# Altium PCB AVR-programming-cable.PcbDoc
Units mil, origin at the board's own origin, x right, y up, seen from the top; angles counter-clockwise.
Board outline 710.01 x 520 mil, 2 copper layers (Top, Bottom), stack 61.902 mil thick; 9 components, 11 nets, 31 pads, 7 vias.
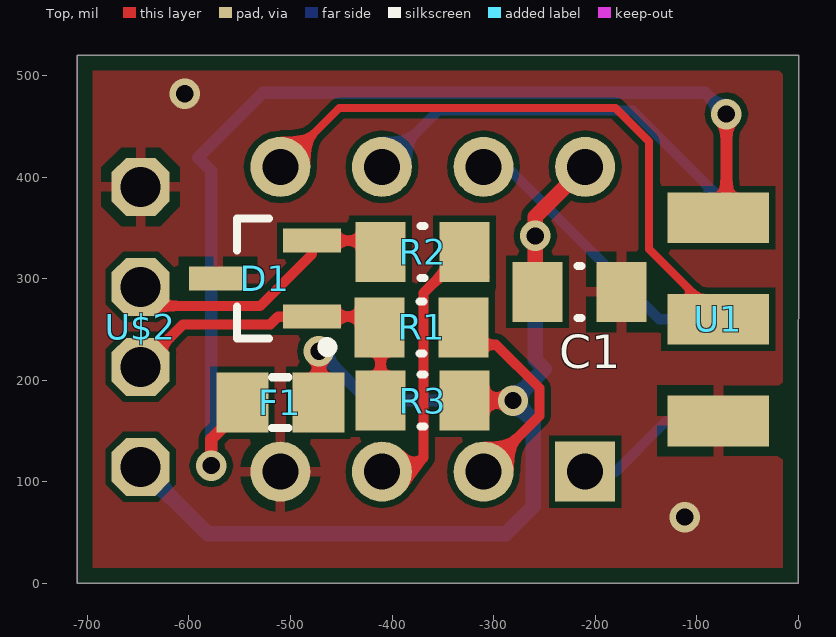
[diagram p0: Top view]
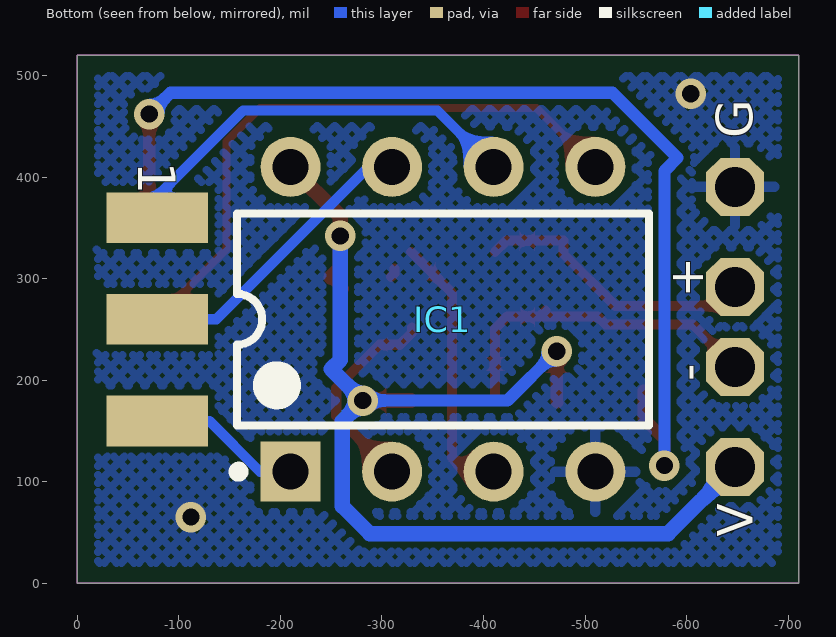
[diagram p1: Bottom view, seen from below]

## Layer stack, top to bottom
Top Solder: solder mask 0.4, Solder Resist, Dk 3.5
Top: signal copper 1.4016
Dielectric 1: core 59.0984, FR-4, Dk 4.8
Bottom: signal copper 1.4016
Bottom Solder: solder mask 0.4, Solder Resist, Dk 3.5

## Board outline
0.01,520 -0.01,0 -710,0 -710,520

## Design rules (kind name [scope] priority, off if disabled: settings)
BoardOutlineClearance [All] p1: gap=15 ignorepadtopadclearanceinfootprint=FALSE
Clearance [All] p1: gap=6 ignorepadtopadclearanceinfootprint=FALSE
Clearance "Clearance (Same Net)" [All] p2: gap=0 ignorepadtopadclearanceinfootprint=FALSE except(6: SMDPad-SMDPad SMDPad-THPad SMDPad-Via)
ComponentClearance [All] p1 off: gap=10 collisioncheckmode=3 verticalgap=10 showdistances=FALSE
Height [All] p1 off: minheight=0 maxheight=1000 prefheight=500
HoleSize HoleSize_1 [All] p1: absolutevalues=TRUE maxlimit=100000 minlimit=13 maxpercent=80.000 minpercent=20.000
HoleSize [All] p2: absolutevalues=TRUE maxlimit=100 minlimit=1 maxpercent=80.000 minpercent=20.000
HoleToHoleClearance mdViaViaSameLayer [All] p1: gap=8 allowstackedmicrovias=TRUE
HoleToHoleClearance [All] p2: gap=10 allowstackedmicrovias=TRUE
MinimumAnnularRing [All] p1: minimumring=5
MinimumSolderMaskSliver [All] p1: minsoldermaskwidth=3
PasteMaskExpansion mlMinCreamFrame [All] p1: expansion=0
PasteMaskExpansion [All] p2: expansion=0
PlaneClearance [All] p1: clearance=10
PolygonConnect ThermalVias [IsVia] p1: connectstyle=Direct reliefconductorwidth=10 reliefentries=4 polygonreliefangle="90 Angle" airgapwidth=10
PolygonConnect [All] p2: thpad.connectstyle=Relief thpad.reliefconductorwidth=10 thpad.reliefentries=4 thpad.polygonreliefangle="90 Angle" thpad.airgapwidth=10 smdpad.connectstyle=Relief smdpad.reliefconductorwidth=10 smdpad.reliefentries=4 smdpad.polygonreliefangle="90 Angle" smdpad.airgapwidth=10 via.connectstyle=Direct via.reliefconductorwidth=10 via.reliefentries=4 via.polygonreliefangle="90 Angle" via.airgapwidth=10
RoutingVias [All] p1: holewidth=17 width=27 viastyle="Through Hole" minholewidth=15 minwidth=28 maxholewidth=32 maxwidth=50
SilkToSilkClearance [All] p1 off: silktosilkclearance=10
SilkToSolderMaskClearance [IsPad] p1 off: minsilkscreentomaskgap=10 clearancetoexposedcopper=TRUE
SolderMaskExpansion mlMinStopFrame [All] p1: expansion=4
SolderMaskExpansion [All] p2: expansion=4
Width Width_1 [All] p1: maxlimit=100000 minlimit=6 preferedwidth=10
Width [All] p2: maxlimit=100 minlimit=6 preferedwidth=10
21 further rules are at their usual default settings.

## Components (designator, comment, footprint, x,y, rotation, side; value= is the part's Value field where it differs from the comment)
C1 "100n" RESC0805(2012)_M -215.5,287 r0 top
D1 "3.6V" SOT23_M -525,300 r180 top
F1 "150mA" SMD-0805 -510,178 r0 top
IC1 "ATTINY85" 8P3 -360,260 r90 bottom
R1 "68" RESC0805(2012)_M -371,252 r0 top
R2 "68" RESC0805(2012)_M -370,326.35 r0 top
R3 "1k5" RESC0805(2012)_M -370,180 r0 top
U1 "6_PIN_ISPEDGE-INVERTED" 6_PIN_EDGE -79,260 r90 top
U$2 "USB2.5-2.0-2.5" USB-FEMALE-A -647.48,252.6 r270 top

## Footprints (in the part's own frame and the unit in brackets; to place one, negate y for a bottom-side part, rotate by r counter-clockwise, add the part's x,y. Pads: shape width x height; smd on the part's side, far side on the other; paste and mask are expansions set on the pad)
6_PIN_EDGE [mil] "6_PIN_EDGE"
  rect 50x100 smd: 1(100,0) 3(0,0) 5(-100,0)
  rect 50x100 smd far side: 2(100,0) 4(0,0) 6(-100,0)
8P3 [mm] "DIP, 8-Pin, Row Spacing 7.62 mm, Pitch 2.54 mm"
  rect 1.5x1.5 hole 0.9: 1(-3.81,3.81)
  round 1.5 hole 0.9: 2(-3.81,1.27) 3(-3.81,-1.27) 4(-3.81,-3.81) 5(3.81,-3.81) 6(3.81,-1.27) 7(3.81,1.27) 8(3.81,3.81)
  silkscreen extent -3.93,-5.15 2.65,5.24, body extent -3.6,-5.15 3.6,5.15, height 5.34
RESC0805(2012)_M [mm] "Chip Resistor, Body 2.0x1.3mm, IPC Low Density"
  rect 1.25x1.5 smd: 1(-1.05,0) 2(1.05,0)
  silkscreen extent -0.05,-0.65 0.05,0.65, body extent -1.1,-0.67 1.1,0.67, height 0.7
SMD-0805 [mil] "SMD-0805"
  rect 51.18x59.06 smd: 1(-37.4,0) 2(37.4,0)
  silkscreen extent -8,-25 8,25
SOT23_M [mm] "SOT23, 3-Leads, Body 2.9x1.3mm, Pitch 0.95mm, Lead Span 2.3mm - Reverse Pinning, IPC Low Density"
  rect 1.45x0.6 smd: 1(-1.175,0.95) 2(-1.175,-0.95) 3(1.175,0)
  silkscreen extent -1.68,-1.5 0.7,1.84, body extent -0.7,-1.5 0.7,1.5, height 1.1
USB-FEMALE-A [mm] "USB-FEMALE-A"
  oct 1.452x1.452 hole 1: D+(-1,0) D-(1,0) GND(-3.5,0) VCC(3.5,0)

## Part data
C1: library part C-EUC0603, "CAPACITOR, European symbol"
D1: library part DUAL_ZENER, "3.6V Zener Diode, Dual Common Anode", Manufacturer="Vishay Semi", MPN=AZ23C3V6-E3, Package=SOT-23
F1: library part FUSE0805
IC1: library part ATTINY45, "Atmel ATTiny45"
R1 R2 R3: library part R-EU_R0603, "RESISTOR, European symbol"
U1: "AVR 6 PIN ISP header Edge connector normal layout"
U$2: USB=USB

## Via types
v1: diameter 30, hole 17, Top to Bottom, tented both sides, 6 vias
v2: diameter 30, hole 17, Top to Bottom, 1 vias

## Nets (pads, with @x,y where several pads share a name; then routed paths per layer and width w, separated by ;. In a path a pad name is that pad's centre, name@x,y a point inside that pad or via, vN(x,y) a via of type N, cw(c..) or ccw(c..) an arc to the next point about the centre after c; other vN are vias at no path point)
+5V: C1.1 F1.2 IC1.8 R3.2 U$2.VCC | length 1174
  Top w12: F1.2 -472,178.6 v1(-472,228.53) ; C1.1@-261.34,290 C1.1@-250,301.34
  Top w15: R3.2 v1(-281,180) ; C1.1@-250,301.34 -259,310.34 v1(-259,342) -259,361 IC1.8
  Bottom w12: v1(-472,228.53) -423.47,180 v1(-281,180)
  Bottom w15: U$2.VCC -581.68,49 -288,49 -261,76 -261,160 v1(-281,180) -250,211 -259,220 v1(-259,342)
D+: D1.2 R2.1 U$2.D+ | length 283
  Top w10: U$2.D+ -628.51,273 -530,273 -478.74,324.26 D1.2 -422.39,337.4 R2.1
D-: D1.1 R1.1 R3.1 U$2.D- | length 353
  Top w10: U$2.D- -605.71,255 -520,255 -512.4,262.6 D1.1 D1.1@-454.97,262.6 ; R3.1 -411.34,251 R1.1 -422.94,262.6 D1.1@-454.97,262.6 ; D1.1@-454.97,262.6 -461,268.63 -461,262.6 D1.1@-454.97,262.6
GND: C1.2 D1.3 IC1.4 U1.5 U$2.GND
  other v1: -112,65.4 -604,482
MISO: IC1.6 U1.2 | length 418.8
  Bottom w10: IC1.6 -354.64,465.36 -163.11,465.36 -76.37,378.63 U1.2@-95,360
MOSI: IC1.5 U1.3 | length 597.2
  Top w8: IC1.5 -452,468 -180,468 -147,435 -147,329 -95,277 U1.3@-95,260
NetF1_1: F1.1 U1.1 | length 1083.9
  Top w12: v1(-578,116) -578,142 -557.4,162.6 F1.1@-557.4,190 ; U1.1@-95,360 -82.5,347.5 -70,360 -71,361 v2(-71,462)
  Bottom w12: v1(-578,116) -578,406 -591,419 -527,483 -92,483 v2(-71,462)
RESET: IC1.1 U1.6 | length 135.7
  Bottom w10: IC1.1 -180,110 -130,160 U1.6@-95,160
SCK: IC1.7 U1.4 | length 277.1
  Bottom w10: IC1.7 -287,410 -137,260 U1.4@-95,260
USB_D+: IC1.3 R2.2 | length 275.4
  Top w10: IC1.3 -383,110 -369,124 -369,286.01 R2.2 ; R2.2@-312.31,310 -312.31,305.08 R2.2@-309.05,301.82
USB_D-: IC1.2 R1.2 | length 213.2
  Top w10: R1.2 -329.66,247.08 -317.58,235 -297.67,235 -255,192.33 -255,165 -300,120 -300,110 IC1.2

## Polygon pours and split planes (outlines as drawn)
GND on Top "Top-GND" (solid, remove dead copper, pour order 0): -700,-20 -700,520 -0.01,520 -0.01,-19.99
GND on Bottom "GND_L02_P002" (hatched 45Degree grid 12 track 7.87, remove dead copper, pour order 2): -710,0 -710,520 -0.01,520 -0.01,0

## Keep-outs
Keep-Out Layer:
  the board outline again, w1

## Silkscreen, mask and mechanical layers (free items; w line width, h text height)
Bottom Overlay:
  text "G" at -665,438 h36 r270
  text "1" at -60,415 h37 r90
  text "+" at -616,281 h35 r270
  text "-" at -618,199 h35 r270
  text "V" at -665,46 h35 r270
Dimension:
  lines w0: -687.48,106.97 ccw(c-648.11,106.97) -648.11,67.6 -589.05,67.6 -242.6,67.6 -218.98,67.6 ccw(c-218.98,106.97) -179.61,106.97 -179.61,437.68 ccw(c-218.98,437.68) -218.98,477.05 -226.85,477.05 -648.11,477.05 ccw(c-648.11,437.68) -687.48,437.68 -687.48,106.97
_tsilk:
  lines w3.94: -411.89,236.89 -407.95,232.95 -407.95,240.83 -411.89,236.89 ; -411.89,236.89 -392.2,236.89 ; -392.2,236.89 -396.14,232.95 -396.14,240.83 -392.2,236.89
  text "F" at -364.65,445.55 h48.83 r90
  text "68" at -427.64,260.51 h48.83
  text "1k5" at -553.62,106.97 h48.83
  text "justgeek.de" at -474.88,83.35 h48.83
_bsilk:
  region: -293.78,417.99 -293.78,461.3 -199.29,461.3 -199.29,417.99
  text "-" at -596.93,417.99 h61.02
  text "+" at -675.67,323.51 h61.02
  text "D" at -577.24,256.58 h48.83
  text "-" at -675.67,189.65 h48.83
  text "+" at -604.8,79.41 h61.02